# Altium PCB motor4-PCB.PcbDoc
Units mil, origin at the board's own origin, x right, y up, seen from the top; angles counter-clockwise.
Board outline 5665.03 x 3265.03 mil, 2 copper layers (Top Layer, Bottom Layer); 167 components, 188 nets, 655 pads, 115 vias.
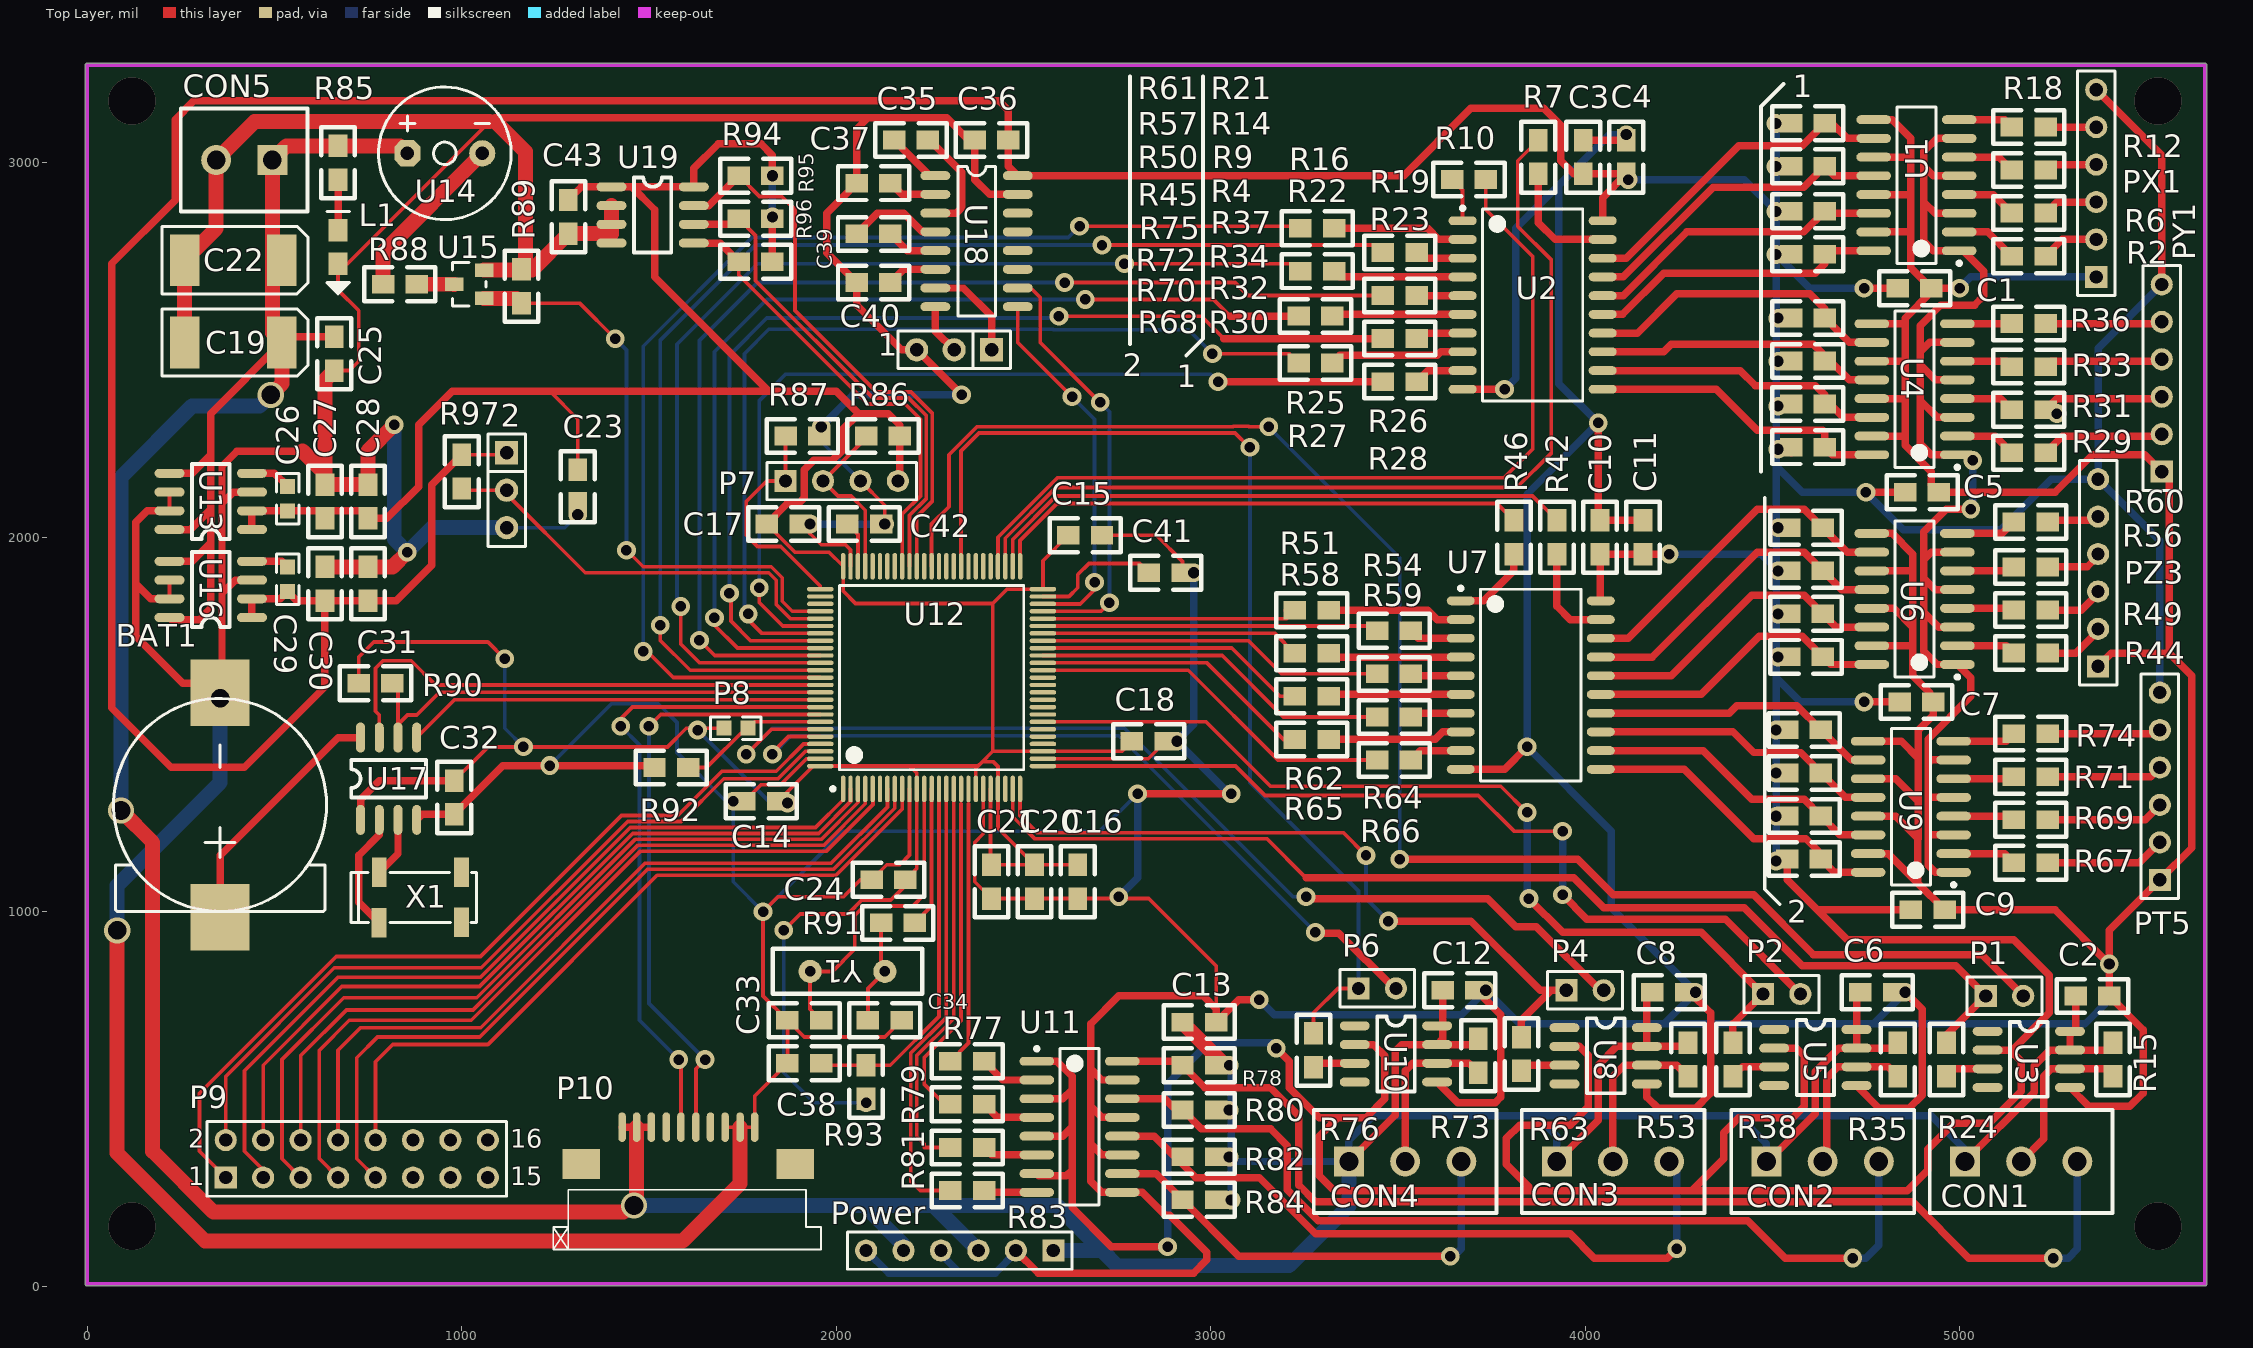
[diagram p0: Top Layer view]
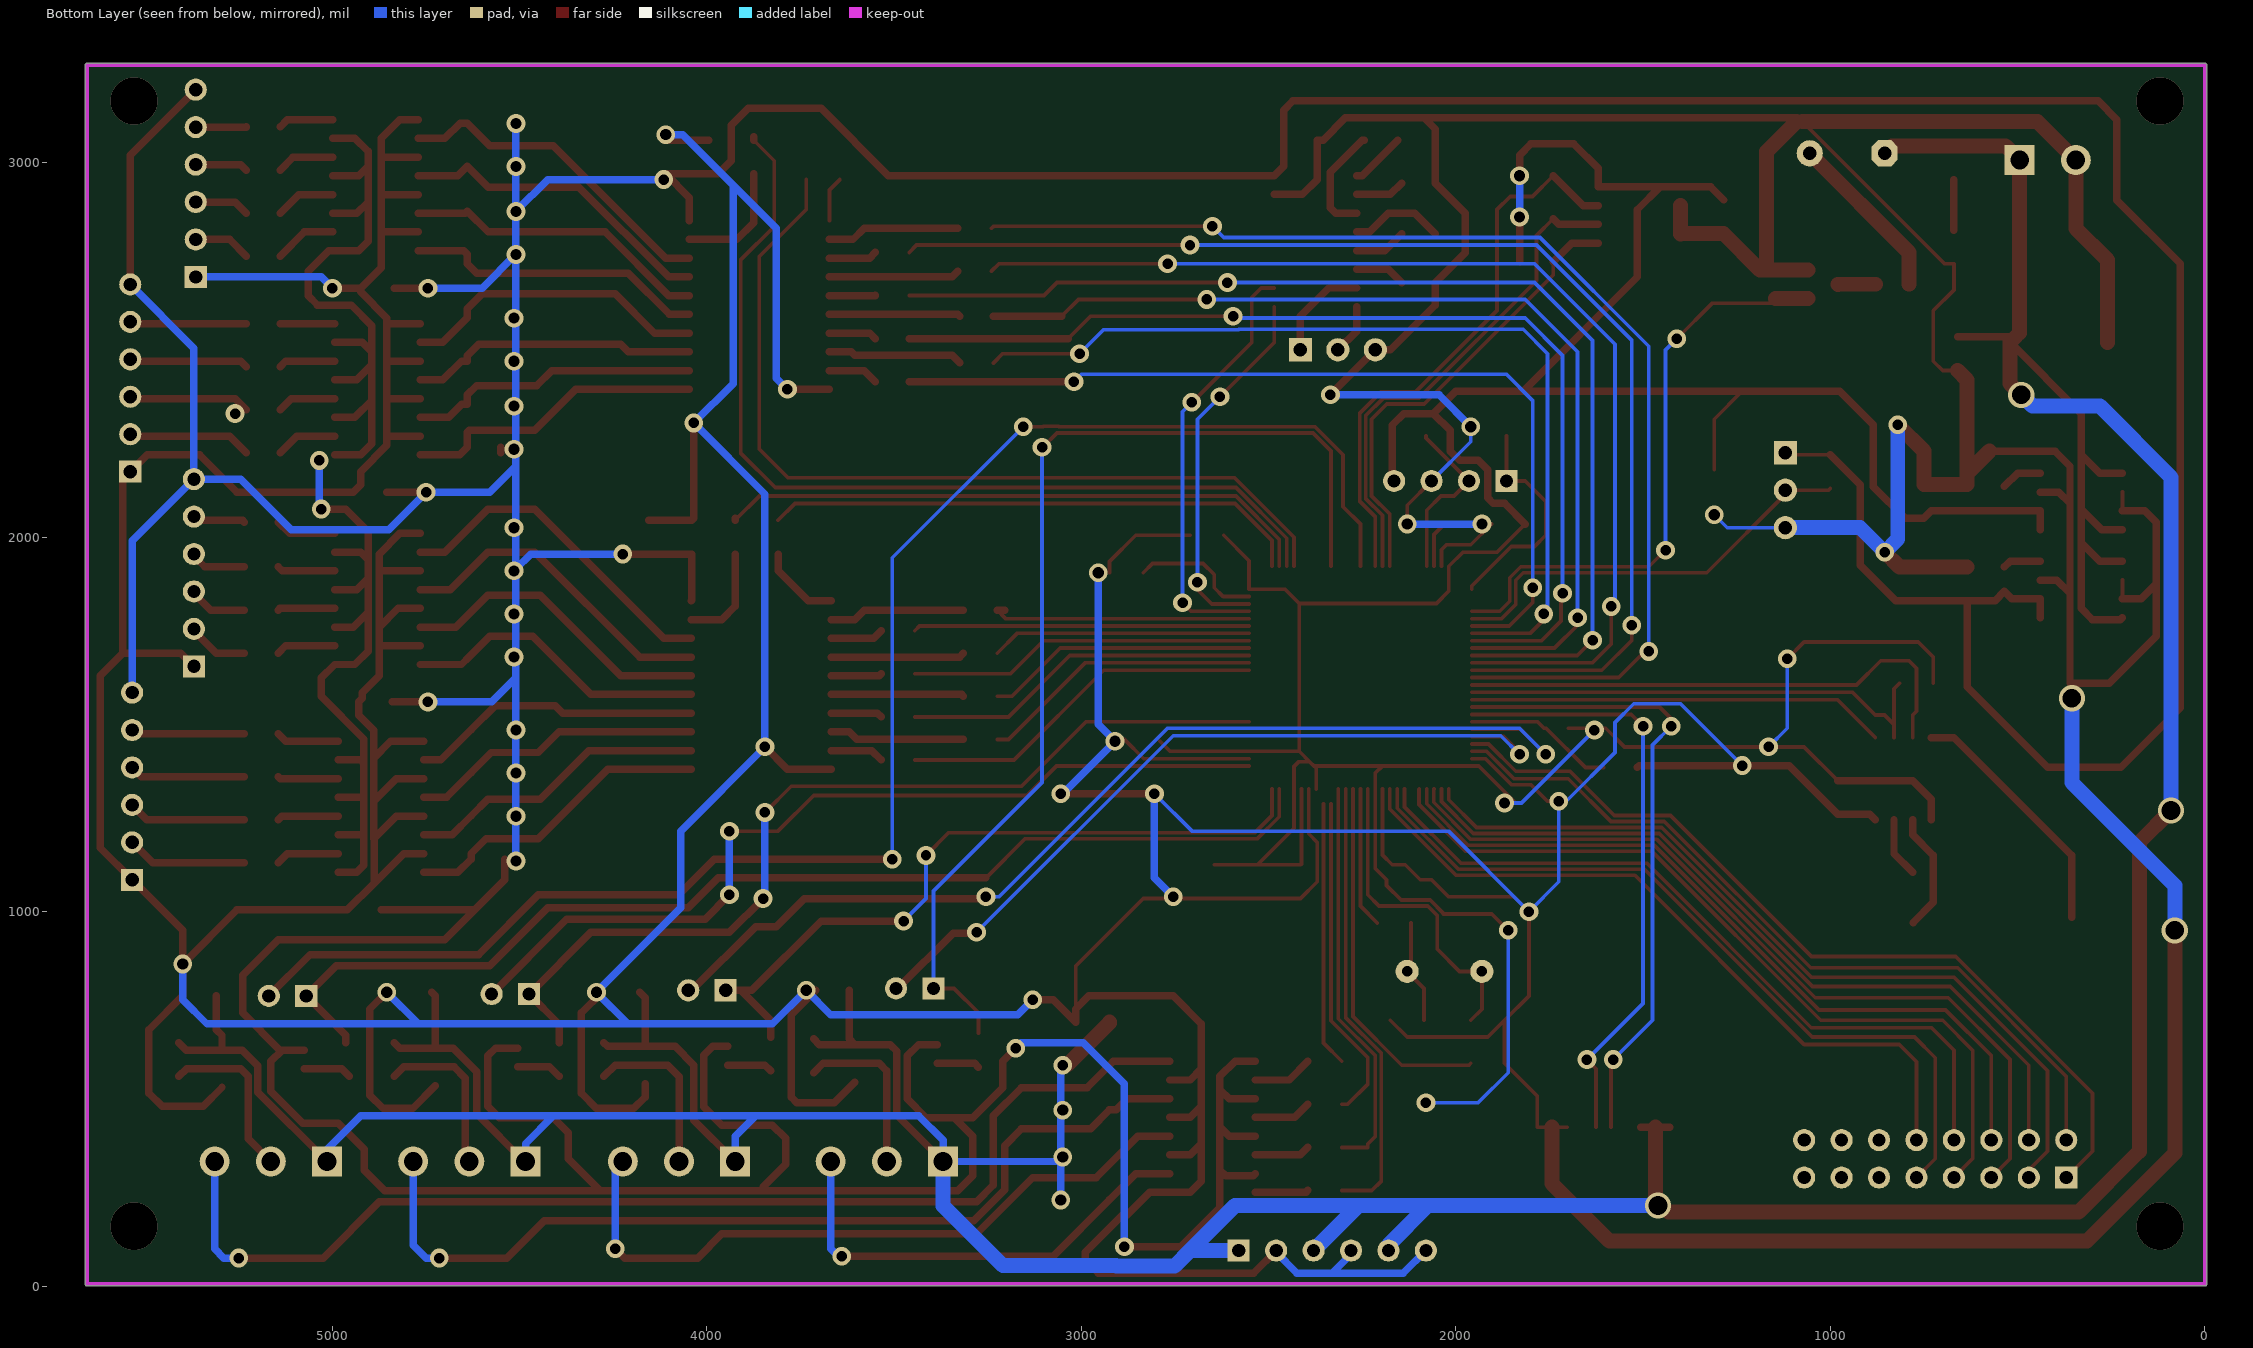
[diagram p1: Bottom Layer view, seen from below]

## Layer stack, top to bottom
Top Solder: solder mask 0.4, Solder Resist, Dk 3.5
Top Layer: signal copper 1.4
Dielectric 1: dielectric 12.6, FR-4, Dk 4.8
Bottom Layer: signal copper 1.4
Bottom Solder: solder mask 0.4, Solder Resist, Dk 3.5

## Board outline
0,0.41 cw(c0,5.43) -5.01,5.43 -5.01,3260.43 cw(c0,3260.43) 0,3265.44 5655,3265.44 cw(c5655,3260.43) 5660.02,3260.43 5660.02,5.43 cw(c5655,5.43) 5655,0.41

## Design rules (kind name [scope] priority, off if disabled: settings)
Clearance [All] p1: gap=6
PolygonConnect [All] p1: connectstyle=Relief reliefconductorwidth=10 reliefentries=4 polygonreliefangle="90 Angle" airgapwidth=10
RoutingVias [All] p1: holewidth=28 width=50 viastyle="Through Hole" minholewidth=28 minwidth=50 maxholewidth=28 maxwidth=50
SilkToSilkClearance [All] p1: silktosilkclearance=0
SilkToSolderMaskClearance [IsPad] p1: minsilkscreentomaskgap=0 clearancetoexposedcopper=TRUE
SolderMaskExpansion [All] p1: expansion=4
Width [All] p1: maxlimit=50 minlimit=10 preferedwidth=10 minimp=50.000000 maximp=50.000000 favimp=50.000000
27 further rules are at their usual default settings.

## Classes and differential pairs
component class stm32-motor4: 1 2 BAT1 C14 C15 C16 C17 C18 C19 C20 C21 C22 C23 C24 C25 C26 C27 C28 C29 C30 C31 C32 C33 C34 C35 C36 C37 C38 C39 C40 C41 C42 C43 CON5 L1 P7 P8 P9 P10 R85 R86 R87 R88 R89 R90 R91 R92 R93 R94 R95 R96 R97 U12 U13 U14 U15 U16 U17 U18 U19 X1 Y1
component class motor-drive: C1 C2 C3 C4 C5 C6 C7 C8 C9 C10 C11 C12 C13 CON1 CON2 CON3 CON4 P1 P2 P4 P6 Power PT5 PX1 PY1 PZ3 R2 R4 R6 R7 R9 R10 R12 R14 R15 R16 R18 R19 R21 R22 R23 R24 R25 R26 R27 R28 R29 R30 R31 R32 R33 R34 R35 R36 R37 R38 R42 R44 R45 R46 R49 R50 R51 R53 R54 R56 R57 R58 R59 R60 R61 R62 R63 R64 R65 R66 R67 R68 R69 R70 R71 R72 R73 R74 R75 R76 R77 R78 R79 R80 R81 R82 R83 R84 U1 U2 U3 U4 U5 U6 U7 U8 U9 U10 U11

## Components (designator, comment, footprint, x,y, rotation, side; value= is the part's Value field where it differs from the comment)
1 "CON3" SIP3 2415,2500.43 r180 top
2 "CON3" SIP3 1120,2225.43 r270 top
BAT1 "BAT3.6V" BAT 355,985 r90 top
C1 "0.1uF" 0805 4835,2665 r0 top
C2 "0.1uF" 0805 5400,775 r180 top
C3 "10uF" 0805 3995,2970 r90 top
C4 "0.1uF" 0805 4110,3060 r270 top
C5 "0.1uF" 0805 4855,2120 r0 top
C6 "0.1uF" 0805 4825,785 r180 top
C7 "0.1uF" 0805 4840,1560 r0 top
C8 "0.1uF" 0805 4270,785 r180 top
C9 "0.1uF" 0805 4870,1005 r0 top
C10 "10uF" 0805 4040,1955 r90 top
C11 "0.1uF" 0805 4155,2045 r270 top
C12 "0.1uF" 0805 3710,790 r180 top
C13 "0.1uF" 0805 2925,705 r0 top
C14 "0.1uF" 0805 1845,1295 r180 top
C15 "0.1uF" 0805 2710,2005 r180 top
C16 "0.1uF" 0805 2645,1035 r90 top
C17 "0.1uF" 0805 1905,2035 r180 top
C18 "0.1uF" 0805 2880,1455 r180 top
C19 "100uF" 100UF/25V_CA 520,2520 r180 top
C20 "0.1uF" 0805 2530,1035 r90 top
C21 "0.1uF" 0805 2415,1035 r90 top
C22 "100uF" 100UF/25V_CA 520,2740 r180 top
C23 "0.1uF" 0805 1310,2090 r90 top
C24 "0.1uF" 0805 2095,1085 r0 top
C25 "0.1uF" 0805 660,2535 r270 top
C26 "103" 0603 535,2070.43 r90 top
C27 "10uF" 0805 635,2050.43 r90 top
C28 "104" 0805 750,2050.43 r90 top
C29 "103" 0603 535,1855.43 r90 top
C30 "10uF" 0805 635,1830.43 r90 top
C31 "104" 0805 750,1830.43 r90 top
C32 "104" 0805 980,1260 r90 top
C33 "8pF" 0805 1960,710 r180 top
C34 "8pF" 0805 2085,710 r0 top
C35 "104" 0805 2245,3060.43 r180 top
C36 "104" 0805 2460,3060.43 r180 top
C37 "104" 0805 2055,2945.43 r0 top
C38 "100nF" 0805 1960,595 r180 top
C39 "104" 0805 2145,2810 r180 top
C40 "104" 0805 2055,2680 r0 top
C41 "2.2uF" 0805 2835,1905 r0 top
C42 "2.2uF" 0805 2030,2035 r0 top
C43 "104" 0805 1285,2900.43 r270 top
CON1 "Header 3" CON3 5150,400 r0 top
CON2 "Header 3" CON3 4620,400 r0 top
CON3 "Header 3" CON3 4060,400 r0 top
CON4 "Header 3" CON3 3505,400 r0 top
CON5 "5VIN" CON2 405,2955 r180 top
L1 "LED" 0805LED 670,2820 r270 top
P1 "Header 2" HDR1X2 5070,775 r0 top
P2 "Header 2" HDR1X2 4475,780 r0 top
P4 "Header 2" HDR1X2 3950,790 r0 top
P6 "Header 2" HDR1X2 3395,795 r0 top
P7 "JTAG" HDR1X4 1865,2150 r0 top
P8 "boot" 0603 1765,1490 r180 top
P9 "Header 8X2" HDR2X8 370,290 r0 top
P10 "ping" PCBComponent_1 1605,375 r0 top
Power "Header 6" HDR1X6 2580,95 r180 top
PT5 "Header 6" HDR1X6 5535,1085 r90 top
PX1 "Header 6" HDR1X6 5365,2695 r90 top
PY1 "Header 6" HDR1X6 5540,2175 r90 top
PZ3 "Header 6" HDR1X6 5370,1655 r90 top
R2 "1K" 0805 5140,2750.43 r0 top
R4 "1K" 0805 4550,2755.43 r0 top
R6 "1K" 0805 5140,2865.43 r0 top
R7 "1K" 0805 3875,3060 r270 top
R9 "1K" 0805 4550,2870.43 r0 top
R10 "1K" 0805 3735,2955 r180 top
R12 "1K" 0805 5140,2980.43 r0 top
R14 "1K" 0805 4550,2990.43 r0 top
R15 "1K" 0805 5410,560 r90 top
R16 "1K" 0805 3240,2825 r0 top
R18 "1K" 0805 5140,3095.43 r0 top
R19 "1K" 0805 3460,2760.43 r0 top
R21 "1K" 0805 4550,3105.43 r0 top
R22 "1K" 0805 3240,2710.43 r0 top
R23 "1K" 0805 3460,2645.43 r0 top
R24 "1K" 0805 4965,650 r270 top
R25 "1K" 0805 3235,2590.43 r0 top
R26 "1K" 0805 3460,2530.43 r0 top
R27 "1K" 0805 3235,2465.43 r0 top
R28 "1K" 0805 3460,2415.43 r0 top
R29 "1K" 0805 5140,2225.43 r0 top
R30 "1K" 0805 4550,2240.43 r0 top
R31 "1K" 0805 5140,2340.43 r0 top
R32 "1K" 0805 4550,2355.43 r0 top
R33 "1K" 0805 5140,2455.43 r0 top
R34 "1K" 0805 4550,2470.43 r0 top
R35 "1K" 0805 4835,560 r90 top
R36 "1K" 0805 5140,2570.43 r0 top
R37 "1K" 0805 4550,2585.43 r0 top
R38 "1K" 0805 4395,650 r270 top
R42 "1K" 0805 3925,2045 r270 top
R44 "1K" 0805 5145,1690.43 r0 top
R45 "1K" 0805 4545,1680.43 r0 top
R46 "1K" 0805 3810,2045 r270 top
R49 "1K" 0805 5145,1805.43 r0 top
R50 "1K" 0805 4545,1795.43 r0 top
R51 "1K" 0805 3225,1805 r0 top
R53 "1K" 0805 4275,560 r90 top
R54 "1K" 0805 3445,1750 r0 top
R56 "1K" 0805 5145,1920.43 r0 top
R57 "1K" 0805 4545,1910.43 r0 top
R58 "1K" 0805 3225,1690 r0 top
R59 "1K" 0805 3445,1635 r0 top
R60 "1K" 0805 5145,2040.43 r0 top
R61 "1K" 0805 4545,2025.43 r0 top
R62 "1K" 0805 3225,1575 r0 top
R63 "1K" 0805 3830,665 r270 top
R64 "1K" 0805 3445,1520 r0 top
R65 "1K" 0805 3225,1460 r0 top
R66 "1K" 0805 3445,1405 r0 top
R67 "1K" 0805 5145,1130.43 r0 top
R68 "1K" 0805 4540,1140.43 r0 top
R69 "1K" 0805 5145,1245.43 r0 top
R70 "1K" 0805 4540,1255.43 r0 top
R71 "1K" 0805 5145,1360.43 r0 top
R72 "1K" 0805 4540,1370.43 r0 top
R73 "1K" 0805 3715,570 r90 top
R74 "1K" 0805 5145,1475.43 r0 top
R75 "1K" 0805 4540,1485.43 r0 top
R76 "1K" 0805 3275,675 r270 top
R77 "1K" 0805 2395,600.43 r180 top
R78 "1K" 0805 2925,590 r0 top
R79 "1K" 0805 2395,485.43 r180 top
R80 "1K" 0805 3015,470.43 r180 top
R81 "1K" 0805 2395,370.43 r180 top
R82 "1K" 0805 3015,345.43 r180 top
R83 "1K" 0805 2395,255.43 r180 top
R84 "1K" 0805 3015,230.43 r180 top
R85 "5.1K" 0805 670,2955 r90 top
R86 "4.7K" 0805 2170,2270 r180 top
R87 "4.7K" 0805 1865,2270 r0 top
R88 "100" 0805 880,2675.43 r180 top
R89 "1M" 0805 1160,2715 r270 top
R90 "5.1K" 0805 815,1610 r180 top
R91 "390" 0805 2210,970 r180 top
R92 "4.7K" 0805 1515,1385 r0 top
R93 "10K" 0805 2080,590 r270 top
R94 "5.1K" 0805 1740,2965.43 r0 top
R95 "5.1K" 0805 1740,2850.43 r0 top
R96 "5.1K" 0805 1740,2735.43 r0 top
R97 "5.1K" 0805 1000,2130 r90 top
U1 "TLP291" SOIC-TLP291-4-16N 4885,2940 r180 top
U2 "CD74HC245M" DW0020A_N 3860,2620 r0 top
U3 "6N137" SO-8 5075,680.43 r0 top
U4 "TLP291" SOIC-TLP291-4-16N 4880,2395 r180 top
U5 "6N137" SO-8 4505,685.43 r0 top
U6 "TLP291" SOIC-TLP291-4-16N 4880,1835 r180 top
U7 "CD74HC245M" DW0020A_N 3855,1605 r0 top
U8 "6N137" SO-8 3945,690 r0 top
U9 "TLP291" SOIC-TLP291-4-16N 4870,1280 r180 top
U10 "6N137" SO-8 3385,695 r0 top
U11 "TLP291" SOIC-TLP291-4-16N 2650,425.43 r0 top
U12 "STM32F405VGT6" STM-LQFP100_N 2255,1625 r90 top
U13 "LTC1763-33" SO-8 440,2020.43 r180 top
U14 "BZ" BZ_SMALL 955,3025 r270 top
U15 "SI2306" SOT-23 980,2675 r90 top
U16 "LTC1763-33" SO-8 440,1785.43 r180 top
U17 "DS1302" SO-8 730,1245 r90 top
U18 "MAX3232" SO-16 2265,2965.43 r0 top
U19 "FM24C64" SO-8 1400,2935.43 r0 top
X1 "32K" XTAL-2 780,1105 r0 top
Y1 "XTAL" XTAL1 1930,840 r0 top

## Footprints (in the part's own frame and the unit in brackets; to place one, negate y for a bottom-side part, rotate by r counter-clockwise, add the part's x,y. Pads: shape width x height; smd on the part's side, far side on the other; paste and mask are expansions set on the pad)
100UF/25V_CA [mm]
  rect 2x3.5 smd: 1(0,0) 2(6.604,0)
  silkscreen extent -1.78,-2.29 8.13,2.29
0603 [mil]
  rect 40x40 smd: 1(0,0) 2(65,0)
  silkscreen extent -35,-30 100,30
0805 [mil]
  rect 60x50 smd: 1(0,0) 2(90,0)
  silkscreen extent -50,-45 140,45
0805LED [mil]
  rect 60x50 smd: 1(0,0) 2(90,0)
  silkscreen extent -50,-30 170,30
BAT [mm]
  rect 4.5x4 smd: 1(0,0) 2(15.24,0)
  silkscreen extent 0.4,-7.22 14.84,7.22
BZ_SMALL [mil]
  oct 70x70 hole 36: 1(0,-100)
  round 70 hole 36: 2(0,100)
  silkscreen extent -177,-177 177,177
CON2 [mil]
  rect 80x80 hole 50: 1(-89.45,-52.2)
  round 80 hole 50: 2(60.55,-52.2)
  silkscreen extent -183,-190 155,86
CON3 [mil]
  rect 80x80 hole 50: 1(-135.51,-67.2)
  round 80 hole 50: 2(14.49,-67.2) 3(164.49,-67.2)
  silkscreen extent -229,-205 259,71
DW0020A_N [mm] "SOIC, 20-Leads, Body 13x7.6mm, Pitch 1.27mm, IPC Medium Density"
  oval 1.9x0.6 smd: 1(-4.75,5.715) 2(-4.75,4.445) 3(-4.75,3.175) 4(-4.75,1.905) 5(-4.75,0.635) 6(-4.75,-0.635) 7(-4.75,-1.905) 8(-4.75,-3.175) 9(-4.75,-4.445) 10(-4.75,-5.715) 11(4.75,-5.715) 12(4.75,-4.445) 13(4.75,-3.175) 14(4.75,-1.905) 15(4.75,-0.635) 16(4.75,0.635) 17(4.75,1.905) 18(4.75,3.175) 19(4.75,4.445) 20(4.75,5.715)
  silkscreen extent -4.87,-6.5 3.4,6.69, body extent -5.16,-6.4 5.16,6.4, height 2.65
HDR1X2 [mm] "Connector; Header; 2 Position"
  rect 1.5x1.5 hole 0.9: 1(0,0)
  round 1.5 hole 0.9: 2(2.54,0)
  silkscreen extent -1.27,-1.27 3.81,1.27
HDR1X4 [mm] "Connector; Header; 4 Position"
  rect 1.5x1.5 hole 0.9: 1(0,0)
  round 1.5 hole 0.9: 2(2.54,0) 3(5.08,0) 4(7.62,0)
  silkscreen extent -1.27,-1.27 8.89,1.27
HDR1X6 [mm] "Connector; Header; 6 Position"
  rect 1.5x1.5 hole 0.9: 1(0,0)
  round 1.5 hole 0.9: 2(2.54,0) 3(5.08,0) 4(7.62,0) 5(10.16,0) 6(12.7,0)
  silkscreen extent -1.27,-1.27 13.97,1.27
HDR2X8 [mm] "Connector; Header; 8x2 Position"
  rect 1.5x1.5 hole 0.9: 1(0,0)
  round 1.5 hole 0.9: 2(0,2.54) 3(2.54,0) 4(2.54,2.54) 5(5.08,0) 6(5.08,2.54) 7(7.62,0) 8(7.62,2.54) 9(10.16,0) 10(10.16,2.54) 11(12.7,0) 12(12.7,2.54) 13(15.24,0) 14(15.24,2.54) 15(17.78,0) 16(17.78,2.54)
  silkscreen extent -1.27,-1.27 19.05,3.81
PCBComponent_1 [mil]
  rect 100x80 smd: 0(-285.5,-49.5) 0(285.5,-49.5)
  oval 20x79 smd: 1(-176.5,49.5) 2(-137.5,49.5) 3(-98.5,49.5) 4(-58.5,49.5) 5(-19.5,49.5) 6(20.5,49.5) 7(59.5,49.5) 8(98.5,49.5) 9(138.5,49.5) 10(177.5,49.5)
  silkscreen extent -360,-278 354,-118
SIP3 [mil]
  rect 62x62 hole 36: 1(0,0)
  round 62 hole 36: 2(100,0) 3(200,0)
  silkscreen extent -50,-50 250,50
SO-8 [mil]
  oval 80x24 smd: 1(0,0) 2(0,-50) 3(0,-100) 4(0,-150) 5(220,-150) 6(220,-100) 7(220,-50) 8(220,0)
  silkscreen extent 60,-175 160,25
SO-16 [mil]
  oval 80x24 smd: 1(0,0) 2(0,-50) 3(0,-100) 4(0,-150) 5(0,-200) 6(0,-250) 7(0,-300) 8(0,-350) 9(220,-350) 10(220,-300) 11(220,-250) 12(220,-200) 13(220,-150) 14(220,-100) 15(220,-50) 16(220,0)
  silkscreen extent 60,-375 160,25
SOIC-TLP291-4-16N [mm] "SOIC, 16-Leads, Body 10.35x4.60mm, Pitch 1.27mm, IPC Medium Density"
  oval 2.35x0.6 smd: 1(-2.9,4.445) 2(-2.9,3.175) 3(-2.9,1.905) 4(-2.9,0.635) 5(-2.9,-0.635) 6(-2.9,-1.905) 7(-2.9,-3.175) 8(-2.9,-4.445) 9(2.9,-4.445) 10(2.9,-3.175) 11(2.9,-1.905) 12(2.9,-0.635) 13(2.9,0.635) 14(2.9,1.905) 15(2.9,3.175) 16(2.9,4.445)
  silkscreen extent -3.03,-5.3 1.33,5.42, body extent -2.4,-5.3 2.4,5.3, height 2.1
SOT-23 [mil]
  rect 36x50 smd: B(-37,-80) C(0,0) E(38,-80)
  silkscreen extent -57,-85 58,5
STM-LQFP100_N [mm] "Thin QFP, 100-Leads, Body 14x14mm, Pitch 0.5mm, IPC Medium Density"
  oval 1.8x0.3 smd: 1(-7.55,6) 2(-7.55,5.5) 3(-7.55,5) 4(-7.55,4.5) 5(-7.55,4) 6(-7.55,3.5) 7(-7.55,3) 8(-7.55,2.5) 9(-7.55,2) 10(-7.55,1.5) 11(-7.55,1) 12(-7.55,0.5) 13(-7.55,0) 14(-7.55,-0.5) 15(-7.55,-1) 16(-7.55,-1.5) 17(-7.55,-2) 18(-7.55,-2.5) 19(-7.55,-3) 20(-7.55,-3.5) 21(-7.55,-4) 22(-7.55,-4.5) 23(-7.55,-5) 24(-7.55,-5.5) 25(-7.55,-6) 51(7.55,-6) 52(7.55,-5.5) 53(7.55,-5) 54(7.55,-4.5) 55(7.55,-4) 56(7.55,-3.5) 57(7.55,-3) 58(7.55,-2.5) 59(7.55,-2) 60(7.55,-1.5) 61(7.55,-1) 62(7.55,-0.5) 63(7.55,0) 64(7.55,0.5) 65(7.55,1) 66(7.55,1.5) 67(7.55,2) 68(7.55,2.5) 69(7.55,3) 70(7.55,3.5) 71(7.55,4) 72(7.55,4.5) 73(7.55,5) 74(7.55,5.5) 75(7.55,6)
  oval 0.3x1.8 smd: 26(-6,-7.55) 27(-5.5,-7.55) 28(-5,-7.55) 29(-4.5,-7.55) 30(-4,-7.55) 31(-3.5,-7.55) 32(-3,-7.55) 33(-2.5,-7.55) 34(-2,-7.55) 35(-1.5,-7.55) 36(-1,-7.55) 37(-0.5,-7.55) 38(0,-7.55) 39(0.5,-7.55) 40(1,-7.55) 41(1.5,-7.55) 42(2,-7.55) 43(2.5,-7.55) 44(3,-7.55) 45(3.5,-7.55) 46(4,-7.55) 47(4.5,-7.55) 48(5,-7.55) 49(5.5,-7.55) 50(6,-7.55) 76(6,7.55) 77(5.5,7.55) 78(5,7.55) 79(4.5,7.55) 80(4,7.55) 81(3.5,7.55) 82(3,7.55) 83(2.5,7.55) 84(2,7.55) 85(1.5,7.55) 86(1,7.55) 87(0.5,7.55) 88(0,7.55) 89(-0.5,7.55) 90(-1,7.55) 91(-1.5,7.55) 92(-2,7.55) 93(-2.5,7.55) 94(-3,7.55) 95(-3.5,7.55) 96(-4,7.55) 97(-4.5,7.55) 98(-5,7.55) 99(-5.5,7.55) 100(-6,7.55)
  silkscreen extent -7.67,-6.25 6.25,6.82, body extent -7,-7 7,7, height 1.6
XTAL1 [mil]
  round 62 hole 28: 1(0.37,0.28) 2(200.37,0.28)
  silkscreen extent -100,-60 300,60
XTAL-2 [mm]
  rect 1x2 smd: 1(0,0) 2(-0.025,-3.404) ""(5.579,-3.378) ""(5.579,0)
  silkscreen extent -1.93,-3.4 6.59,0

## Part data
1 2: "Connector"
C1 C2 C3 C4 C5 C6 C7 C8 C9 C10 C11 C12 C13: library part CAP, "Capacitor"
C14 C15 C16 C17 C18 C20 C21 C23 C24 C25 C26 C27 C28 C29 C30 C31 C32 C33 C34 C35 C36 C37 C38 C39 C40 C41 C42 C43: library part C
C19 C22: library part ELECTRO1
CON1 CON2 CON3 CON4: "Header, 3-Pin"
CON5 P8: library part "Header 2", "Header, 2-Pin"
P1 P2 P4 P6: "Header, 2-Pin"
P7: library part "Header 4", "Header, 4-Pin"
P9: "Header, 8-Pin, Dual row"
P10: library part "Header 10", "Header, 10-Pin"
Power PT5 PX1 PY1 PZ3: "Header, 6-Pin"
R2 R4 R6 R7 R9 R10 R12 R14 R15 R16 R18 R19 R21 R22 R23 R24 R25 R26 R27 R28 R29 R30 R31 R32 R33 R34 R35 R36 R37 R38 R42 R44 R45 R46 R49 R50 R51 R53 R54 R56 R57 R58 R59 R60 R61 R62 R63 R64 R65 R66 R67 R68 R69 R70 R71 R72 R73 R74 R75 R76 R77 R78 R79 R80 R81 R82 R83 R84: library part RES2
R85 R86 R87 R88 R89 R90 R91 R92 R93 R94 R95 R96 R97: library part RES
U1 U4 U6 U9 U11: library part TLP291-4, "光耦隔离"
U2 U7: "High Speed CMOS Logic Non-Inverting Octal-Bus Transceivers with 3-State Outputs, DW0020A, TUBE"
U3 U5 U8 U10: library part HCPL2400
U12: "ARM Cortex-M4 32-bit MCU+FPU, 210 DMIPS, 1024 kB Flash, 192 kB Internal RAM, 82 I/Os, 100-pin LQFP, -40 to 85 degC, Tray"
U13 U16: library part LT1763
U15: library part MOFET_N
X1: library part XTAL
Y1: "Crystal Oscillator"

## Via types
v1: diameter 50, hole 28, Top Layer to Bottom Layer, 73 vias
v2: diameter 50, hole 30, Top Layer to Bottom Layer, 33 vias
v3: diameter 70, hole 50, Top Layer to Bottom Layer, 5 vias
v4: diameter 126, hole 126, Top Layer to Bottom Layer, 4 vias

## Nets (pads, with @x,y where several pads share a name; then routed paths per layer and width w, separated by ;. In a path a pad name is that pad's centre, name@x,y a point inside that pad or via, vN(x,y) a via of type N, cw(c..) or ccw(c..) an arc to the next point about the centre after c; other vN are vias at no path point)
18B20: 2.2 R97.1 U12.80 | length 1145.9
  Top Layer w10: R97.1 1004.57,2125.43 2.2 1120,2115 1330,1905 1820,1905 1840,1885 1840,1820 1877.52,1782.48 U12.80
+3.3V_D: C14.1 C15.2 C16.2 C17.2 C18.2 C20.2 C21.2 C23.2 C24.2 C26.1 C27.1 C28.1 C32.2 C43.1 P7.4 P8.2 R86.1 R90.2 R93.2 R94.2 R95.2 R96.2 U12.11 U12.19 U12.21 U12.22 U12.28 U12.50 U12.75 U12.100 U13.1 U13.2 U17.1 U19.1 U19.8 | length 11353.4
  Top Layer w10: R90.2 725,1680 765,1720 1070,1720 v1(1115,1675) ; C32.2 1070,1440 v1(1165,1440) 1550,1440 1600,1490 P8.2 ; 1235,2390 1310,2315 C23.2 ; C17.2 1890,1960 1981.02,1960 U12.75 2018.78,1856.22 2051.85,1823.15 2418.15,1823.15 ; C14.1 1938.78,1388.78 U12.100 2196.22,1388.78 ; v1(1860,950) 1904,994 2034,994 2034,996.63 2068.37,1031 2146,1031 2185,1070 C24.2 2215.63,1115.63 U12.11 2215.63,1369.37 2196.22,1388.78 ; U12.19 2373.11,1383.11 2378.78,1388.78 ; U12.21 2412.48,1127.52 C21.2 C20.2 ; C15.2 2552.24,1937.24 U12.50 2456.22,1861.22 2418.15,1823.15 ; C16.2 C20.2 ; C18.2 2763.15,1428.15 U12.28 2418.15,1428.15 ; 2196.22,1388.78 2378.78,1388.78 ; 2378.78,1388.78 2390,1400 ; 2390,1400 2420,1400 2432.17,1387.83 U12.22 2432.17,1222.83 C20.2 ; 2390,1400 2418.15,1428.15 ; 2418.15,1428.15 2418.15,1823.15
  Top Layer w20: U13.1 U13.2 730,2070.43 C28.1 800.43,2050.43 885,2135 885,2300 975,2390 1235,2390 1820,2390 ; U17.1 730,1300 780,1350 C32.2 ; C43.1 1320,2935.43 U19.1 1454.57,2935.43 ; C17.2 1870,2090 1900,2090 1915,2105 1915,2180 1940,2205 1990,2205 2015,2230 2015,2285 2060,2330 ; R96.2 R95.2 ; R94.2 1830,3020 1800,3050 1685,3050 1620,2985 U19.8 1454.57,2935.43 ; P7.4 2170,2155 R86.1 2170,2299.5 2139.5,2330 2060,2330 ; 1454.57,2935.43 1515,2875 1515,2695 1820,2390 ; 1820,2390 2000,2390 2060,2330
  Bottom Layer w10: v1(1115,1675) 1115,1490 v1(1165,1440) ; v1(1630,1485) 1825,1290 v2(1870,1290) ; v1(1860,950) 1860,570 1940,490 v1(2080,490)
  Bottom Layer w20: v2(1830,2855) v2(1830,2965)
+3.3V_DO: 2.1 C1.1 C3.1 C4.2 C5.1 C7.1 C9.1 C10.1 C11.2 C29.1 C30.1 C31.1 C36.1 PT5.6 PX1.6 PY1.6 PZ3.6 R4.1 R9.1 R14.1 R21.1 R30.1 R32.1 R34.1 R37.1 R45.1 R50.1 R57.1 R61.1 R68.1 R70.1 R72.1 R75.1 R97.2 U2.20 U3.2 U5.2 U7.20 U8.2 U10.2 U11.1 U11.3 U11.5 U11.7 U16.1 U16.2 U18.16 | length 22235.1
  Top Layer w10: R97.2 1114.57,2220 2.1
  Top Layer w20: U16.1 U16.2 515,1835.43 C29.1 560,1830.43 C30.1 ; R97.2 920,2140 920,1925 825.43,1830.43 C31.1 C30.1 ; U11.7 2541.26,295 2615,295 2630,310 ; U11.5 2605.43,400.43 2630,425 ; U11.3 2605.43,500.43 2630,525 ; U11.1 2589.57,600.43 2630,560 2630,525 ; v1(2885,105) 2735,105 2630,210 2630,310 ; v1(3175,635) 3210,600 3210,530 3290,450 3340,450 ; U10.2 3435,645 3465,615 3465,500 3415,450 3340,450 ; 3850,265 3790,325 3790,395 3825,430 3960,430 4009,479 4009,616 3985,640 U8.2 ; U7.20 4040,1832.01 C10.1 C11.2 v1(4225,1955) ; U2.20 4047.01,2907.01 C4.2 C3.1 3970,2970 3935,3005 3935,3100 3890,3145 3695,3145 3515.43,2965.43 U18.16 2460,2990.43 C36.1 2460,3140 2435,3165 285,3165 235,3115 235,2900 65,2730 65,1545 225,1385 420,1385 635,1600 C30.1 ; U5.2 4564.57,635.43 4585,615 4585,480 4555,450 4410,450 4370,410 4370,340 4285,255 ; R68.1 4540,1085 4620,1005 ; R30.1@4550,2225 R30.1 ; v1(4745,1560) C7.1 ; v1(4745,2665) C1.1 ; v1(4750,2120) C5.1 ; C9.1 4620,1005 ; U3.2 5134.57,630.43 ; PX1.6 5540,3020 PY1.6 ; 2630,310 2630,425 ; 2630,425 2630,525 ; 3340,450 3290,400 3290,295 3330,255 4285,255 ; 4285,255 4860,255 4915,310 4915,365 4985,435 5079.92,435 5165,520.08 5165,600 5134.57,630.43 ; 4620,1005 4700,925 5145,925 5240,830 5240,730 5140.43,630.43 5134.57,630.43
  Bottom Layer w20: v1(2885,105) 2885,540 2995,650 3160,650 v1(3175,635) ; v1(4115,2955) 4425,2955 v2(4510,2870) ; v1(4225,1955) 4470,1955 v2@4510,1915 ; v2(4510,1135) v2(4510,1255) v2(4510,1370) v2(4510,1485) 4510,1625 ; v2(4510,3105) v2(4510,2990) v2(4510,2870) ; v2(4515,1910) v2@4510,1915 ; v1(4745,1560) 4575,1560 4510,1625 ; v1(4745,2665) 4600,2665 v2(4510,2755) ; PT5.6 5535,1990 PZ3.6 ; PY1.6 5370,2505 PZ3.6 ; 4510,1625 4510,1675 v2(4515,1680) 4510,1685 v2@4510,1915 ; v2@4510,1915 4510,2190 ; 4510,2190 4580,2120 v1(4750,2120) 4850,2020 5110,2020 5245,2155 PZ3.6 ; 4510,2190 v2(4510,2755) ; v2(4510,2755) v2(4510,2870)
  other v2: 4515,1795 4515,2025 4515,2235 4515,2350 4515,2470 4515,2585
+5V_A: U1.1 U1.3 U1.5 U1.7 U4.1 U4.3 U4.5 U4.7 U6.1 U6.3 U6.5 U6.7 U9.1 U9.3 U9.5 U9.7 | length 3678.5
  Top Layer w20: 4921,1305 U9.5 ; U9.1 4935,1105 4916,1124 4916,1205 ; U9.3 4916,1205 ; U9.7 4925,1405 4916,1396 ; U6.3 4945,1760 4905,1800 ; U6.5 4935,1860 4905,1890 ; U6.7 4925,1960 4905,1940 ; U4.1 4925,2220 4895,2250 4895,2365 ; U4.3 4940,2320 4895,2365 ; U4.5 4935,2420 4895,2460 ; U4.7 4920,2520 4895,2495 ; U1.3 4935,2865 4905,2895 ; U1.5 4930,2965 4905,2990 ; U1.7 4940,3065 4905,3030 4905,2990 ; v1(5030,2075) 4965,2075 4905,2015 4905,1940 ; 4895,2365 4895,2460 ; 4895,2460 4895,2495 ; 4895,2495 4895,2565 4950,2620 5040,2620 5065,2645 5065,2710 5010,2765 U1.1 4930,2765 4905,2790 4905,2895 ; 4905,1800 4905,1695 4940,1660 U6.1 5030,1624.17 5030,1575 4916,1461 4916,1396 ; 4905,1800 4905,1890 ; 4905,1890 4905,1940 ; 4905,2895 4905,2990 ; 4916,1205 4916,1396
  Bottom Layer w20: v1(5030,2075) 5035,2080 v1(5035,2205)
+5V_IN: C2.2 C6.2 C8.2 C12.2 C13.1 C19.1 C22.1 C25.1 CON1.1 CON2.1 CON3.1 CON4.1 CON5.1 P10.1 P10.2 P10.3 Power.1 Power.3 Power.5 R15.2 R35.2 R53.2 R73.2 R78.2 R80.1 R82.1 R84.1 R85.2 U3.7 U3.8 U5.7 U5.8 U8.7 U8.8 U10.7 U10.8 U13.5 U13.8 U14.1 U16.5 U16.8 | length 14926.3
  Top Layer w20: U16.8 225.43,1780 300,1780 330,1810 330,1985 ; U16.5 280.43,1935.43 330,1985 ; U13.8 275.43,2020.43 330,2075 ; U13.5 280.43,2170.43 330,2220 ; C19.1@494.45,2545.55 505,2535 C25.1 ; C19.1 330,2330 330,2220 ; P10.1 P10.2 P10.3 ; CON4.1 3492.5,455.81 3492.5,627.5 3510,645 U10.7 ; C12.2 3620,660 U10.7 ; R73.2 3700,645 U10.7 ; CON3.1 4035,443.31 4035,590 4085,640 U8.7 ; C8.2 4165,770 U8.8 U8.7 ; R53.2 4265,640 U8.7 ; CON2.1 4487.8,332.8 4615,460 4615,572.43 4678,635.43 U5.7 ; C6.2 4725,775 U5.8 U5.7 ; R35.2 4820.43,635.43 U5.7 ; CON1.1 5199,517.31 5199,589 5240.43,630.43 U3.7 ; C2.2 5310,685 5295,670 U3.7 ; R15.2 5390.43,630.43 U3.7 ; 330,1985 330,2075 ; 330,2075 330,2220
  Top Layer w40: v3@85,1275 v3(90,1270) 175,1185 175,360 337.5,197.5 1432.5,197.5 1467.5,232.5 P10.2 ; v3(490,2380) 520,2410 C19.1 C19.1@505,2535 ; C19.1@494.45,2545.55 CON5.1 532.24,3045 R85.2 835,3045 U14.1 ; C13.1 2925,703.23 3038.23,590 v1(3050,590)
  Bottom Layer w20: v2(3050,345) v2@3055,340 ; v2(3055,230) v2@3055,340 ; v1@3055,590 v2@3055,340 ; CON3.1 3924.49,400.51 3870,455 ; CON2.1 4484.49,380.51 4410,455 ; CON1.1 5014.49,365.51 4925,455 4410,455 ; v2@3055,340 3062.2,332.8 CON4.1 3369.49,389.49 3435,455 3870,455 ; 3870,455 4410,455
  Bottom Layer w40: v3(90,1270) 90,2160 280,2350 460,2350 v3(490,2380) ; v3(1460,215) 2075,215 ; Power.5 2180,110 2075,215 ; Power.3 2260,215 ; Power.1 2710,95 ; CON4.1 3369.49,214.49 3210,55 2907.12,55 2906.12,54 2751,54 2710,95 ; 2075,215 2260,215 ; 2260,215 2590,215 2710,95
  other v2: 3050,470
BREAK_DIR1: R46.1 U12.51 | length 1447.3
  Top Layer w10: U12.51 2491.22,1991.22 2590,2090 3765,2090 R46.1
BREAK_DIR2: R10.1 U12.54 | length 2374.7
  Top Layer w10: U12.54 2432.17,2000.05 2590.93,2158.81 3783.81,2158.81 3860,2235 3860,2750 3735,2875 R10.1
BREAK_IN1: R16.1 U12.88 | length 3210.5
  Top Layer w10: v1(1485,1695) 1490,1700 1565,1625 U12.88 ; v1(2650,2830) 3235,2830 R16.1
  Bottom Layer w10: v1(1485,1695) 1485,2510 1775,2800 2620,2800 v1(2650,2830)
BREAK_IN2: R19.1 U12.87 | length 3304.8
  Top Layer w10: v1(1530,1765) 1530,1725 1610.31,1644.68 U12.87 ; v1(2710,2780) 3440.43,2780 R19.1
  Bottom Layer w10: v1(1530,1765) 1530,2525 1785,2780 v1(2710,2780)
BREAK_IN3: R22.1 U12.86 | length 2960
  Top Layer w10: v1@1575,1810 1585,1800 1585,1715 1635.63,1664.37 U12.86 ; v1(2770,2730) 3220.43,2730 R22.1
  Bottom Layer w10: v1@1575,1810 1575,2515 1790,2730 v1(2770,2730)
  other v1: 1585,1815
BREAK_IN4: R23.1 U12.85 | length 3043.2
  Top Layer w10: v1(1635,1725) 1675.94,1684.06 U12.85 ; v1(2610,2680) 3065.43,2680 3100,2645.43 R23.1
  Bottom Layer w10: v1(1635,1725) 1635,2525 1790,2680 v1(2610,2680)
BREAK_IN5: R25.1 U12.84 | length 2674.6
  Top Layer w10: v1@1675,1765 1736.26,1703.74 U12.84 ; v1(2665,2635) 3008.14,2635 3052.71,2590.43
  Top Layer w20: 3052.71,2590.43 R25.1
  Bottom Layer w10: v1@1675,1765 1675,2495 1815,2635 v1(2665,2635)
  other v1: 1675,1785
BREAK_IN6: R26.1 U12.83 | length 2784.4
  Top Layer w10: v1(1715,1850) 1719,1846 1719,1776 1771.57,1723.43 U12.83 ; v1(2595,2590) 2975.56,2590 3035.13,2530.43
  Top Layer w20: 3035.13,2530.43 R26.1
  Bottom Layer w10: v1(1715,1850) 1715,2485 1815,2585 2590,2585 v1(2595,2590)
BREAK_IN7: R27.1 U12.82 | length 2473.3
  Top Layer w10: v1@1755,1795 1750,1795 1801.89,1743.11 U12.82 ; v1(3005,2490) 3210.43,2490 R27.1
  Bottom Layer w10: v1@1755,1795 1755,2490 1820,2555 2579.09,2555 2580.09,2554 2941,2554 v1(3005,2490)
  other v1: 1765,1795
BREAK_IN8: R28.1 U12.81 | length 2430.4
  Top Layer w10: v1(1795,1865) 1795,1825 1857.2,1762.8 U12.81
  Top Layer w20: v1@3020.43,2415.43 R28.1
  Bottom Layer w10: v1(1795,1865) 1795,2365 1865,2435 3000,2435 v1(3020,2415)
BREAK_IN9: R51.1 U12.46 | length 702.1
  Top Layer w10: U12.46 3202.48,1782.48 R51.1
  Top Layer w20: R51.1@3205,1805 R51.1
BREAK_IN10: R54.1 U12.45 | length 898.1
  Top Layer w10: U12.45 3432.2,1762.8 R54.1
BREAK_IN11: R58.1 U12.44 | length 694.8
  Top Layer w10: U12.44 3171.89,1743.11 R58.1
BREAK_IN12: R59.1 U12.43 | length 929.4
  Top Layer w10: U12.43 3101.57,1723.43 3190,1635 R59.1
BREAK_IN13: R62.1 U12.42 | length 726.1
  Top Layer w10: U12.42 3056.26,1703.74 3185,1575 R62.1
BREAK_IN14: R64.1 U12.41 | length 960.7
  Top Layer w10: U12.41 3030.94,1684.06 3195,1520 R64.1
BREAK_IN15: R65.1 U12.40 | length 757.4
  Top Layer w10: U12.40 2990.63,1664.37 3195,1460 R65.1
BREAK_IN16: R66.1 U12.39 | length 992
  Top Layer w10: U12.39 2940.31,1644.68 3180,1405 R66.1
BREAK_OE1: R42.1 U12.52 | length 1605.3
  Top Layer w10: U12.52 2471.54,1994.16 2587.37,2110 3860,2110 R42.1
  Top Layer w20: R42.1 R42.1@3925,2050
BREAK_OE2: R7.1 U12.53 | length 2532.5
  Top Layer w10: U12.53 2451.85,1997.11 2587.37,2132.63 3817.63,2132.63 3910,2225 3910,2740 3820,2830 3820,3005 R7.1
  Top Layer w20: R7.1 R7.1@3875,3070
BREAK_OUT1: R21.2 U1.10 U2.18 | length 889.9
  Top Layer w20: U2.18 4110,2745 4410,3045 4579.57,3045 R21.2 4659.14,3105.43 4699.57,3065 U1.10
BREAK_OUT2: R14.2 U1.12 U2.17 | length 856.7
  Top Layer w20: U2.17 4102.43,2695 4342.43,2935 4584.57,2935 R14.2 4665.43,2965 U1.12
BREAK_OUT3: R9.2 U1.14 U2.16 | length 819.4
  Top Layer w20: U2.16 4102.01,2645 4272.01,2815 4584.57,2815 R9.2 4645.43,2865 U1.14
BREAK_OUT4: R4.2 U1.16 U2.15 | length 809.1
  Top Layer w20: U2.15 4100,2595 4210,2705 4615,2705 4640,2730 R4.2 4649.57,2765 U1.16
BREAK_OUT5: R37.2 U2.14 U4.10 | length 830.6
  Top Layer w20: U2.14 4140,2545 4245,2650 4600,2650 4640,2610 R37.2 4705.43,2520 U4.10
BREAK_OUT6: R34.2 U2.13 U4.12 | length 775.3
  Top Layer w20: U2.13 4210,2495 4230.43,2515.43 4609.57,2515.43 4640,2485 R34.2 4654.57,2470.43 4705,2420 U4.12
BREAK_OUT7: R32.2 U2.12 U4.14 | length 785
  Top Layer w20: U2.12 4415,2445 4455,2405 4615,2405 4640,2380 R32.2 4654.57,2355.43 4690,2320 U4.14
BREAK_OUT8: R30.2 U2.11 U4.16 | length 814.5
  Top Layer w20: U2.11 4350.43,2395 4460,2285.43 4634.57,2285.43 4640,2280 R30.2 4660.43,2220 U4.16
BREAK_OUT9: R61.2 U6.10 U7.18 | length 914.4
  Top Layer w20: U7.18 4115,1730 4460,2075 4585.43,2075 R61.2 4700.43,1960 U6.10
BREAK_OUT10: R57.2 U6.12 U7.17 | length 881.2
  Top Layer w20: U7.17 4180,1680 4460,1960 4585.43,1960 R57.2 4685.43,1860 U6.12
BREAK_OUT11: R50.2 U6.14 U7.16 | length 848.1
  Top Layer w20: U7.16 4230,1630 4445,1845 4585.43,1845 R50.2 4670.43,1760 U6.14
BREAK_OUT12: R45.2 U6.16 U7.15 | length 819.1
  Top Layer w20: U7.15 4310,1580 4405,1675 4465,1735 4580.43,1735 R45.2 4655.43,1660 U6.16
BREAK_OUT13: R75.2 U7.14 U9.10 | length 782.2
  Top Layer w20: U7.14 4385,1530 4405,1550 4565.43,1550 R75.2 4710.43,1405 U9.10
BREAK_OUT14: R72.2 U7.13 U9.12 | length 786.3
  Top Layer w20: U7.13 4395,1480 4450,1425 4575.43,1425 R72.2 4695.43,1305 U9.12
BREAK_OUT15: R70.2 U7.12 U9.14 | length 807
  Top Layer w20: U7.12 4315.43,1430 4445,1300.43 4585,1300.43 R70.2 4680.43,1205 U9.14
BREAK_OUT16: R68.2 U7.11 U9.16 | length 836.3
  Top Layer w20: U7.11 4265,1380 4450,1195 4590,1195 4630,1155 R68.2 4665.43,1105 U9.16
BREAK_OUTT1: PX1.2 R2.2 | length 153.5
  Top Layer w20: R2.2 5274.57,2795 PX1.2
BREAK_OUTT2: PX1.3 R6.2 | length 147.2
  Top Layer w20: R6.2 5259.57,2895 PX1.3
BREAK_OUTT3: PX1.4 R12.2 | length 141
  Top Layer w20: R12.2 5244.57,2995 PX1.4
BREAK_OUTT4: PX1.5 R18.2 | length 135.2
  Top Layer w20: R18.2 5230.43,3095 PX1.5
BREAK_OUTT5: PY1.2 R29.2 | length 330.5
  Top Layer w20: R29.2 5274.57,2270 5535,2270 PY1.2
BREAK_OUTT6: PY1.3 R31.2 | length 324.3
  Top Layer w20: R31.2 5259.57,2370 5535,2370 PY1.3
  other v1: 5260,2330
BREAK_OUTT7: PY1.4 R33.2 | length 318.1
  Top Layer w20: R33.2 5244.57,2470 5535,2470 PY1.4
BREAK_OUTT8: PY1.5 R36.2 | length 312.2
  Top Layer w20: R36.2 5230.43,2570 5535,2570 PY1.5@5540,2565
BREAK_OUTT9: PZ3.2 R44.2 | length 152.6
  Top Layer w20: R44.2 5310.43,1690.43 PZ3.2@5365,1745
BREAK_OUTT10: PZ3.3 R49.2 | length 146.4
  Top Layer w20: R49.2 5325.43,1805.43 PZ3.3@5365,1845
BREAK_OUTT11: PZ3.4 R56.2 | length 140.2
  Top Layer w20: R56.2 5340.43,1920.43 PZ3.4@5365,1945
BREAK_OUTT12: PZ3.5 R60.2 | length 131.9
  Top Layer w20: R60.2 5239.57,2045 PZ3.5@5365,2045
BREAK_OUTT13: PT5.2 R67.2 | length 322.6
  Top Layer w20: R67.2 5480.43,1130.43 PT5.2
BREAK_OUTT14: PT5.3 R69.2 | length 316.4
  Top Layer w20: R69.2 5280,1245.43 5280.57,1246 5496,1246 PT5.3
BREAK_OUTT15: PT5.4 R71.2 | length 310.2
  Top Layer w20: R71.2 5510.43,1360.43 PT5.4
BREAK_OUTT16: PT5.5 R74.2 | length 304
  Top Layer w20: R74.2 5525.43,1475.43 PT5.5
BZ: R89.2 U12.79 U15.B | length 1594.1
  Top Layer w10: R89.2@1147,2638 R89.2 1315,2625 v1(1410,2530) ; v1(1440,1965) 1441,1965 1485,1921 1826.63,1921 1856,1891.63 1856,1829 1882.83,1802.17 U12.79
  Top Layer w40: U15.B R89.2@1147,2638
  Bottom Layer w10: v1(1410,2530) 1440,2500 v1(1440,1965)
CE_1302: U12.91 U17.5 | length 1119.6
  Top Layer w10: U17.5 980.94,1565.94 U12.91
CLK_1302: U12.89 U17.7 | length 1412
  Top Layer w10: U17.7 780,1525 770,1535 770,1650 790,1670 865.32,1670 930,1605.32 U12.89
DGND: 1.3 2.3 BAT1.2 C1.2 C2.1 C3.2 C4.1 C5.2 C6.1 C7.2 C8.1 C9.2 C10.2 C11.1 C12.1 C13.2 C14.2 C15.1 C16.1 C17.1 C18.1 C19.2 C20.1 C21.1 C22.2 C23.1 C24.1 C25.2 C27.2 C28.2 C30.2 C31.2 C32.1 C33.2 C34.2 C36.2 C37.1 C38.2 C40.1 C41.2 C42.2 C43.2 CON5.2 L1.2 P7.3 P10.8 P10.9 P10.10 Power.2 Power.4 Power.6 PT5.1 PX1.1 PY1.1 PZ3.1 R87.2 R89.1 R92.1 U1.9 U1.11 U1.13 U1.15 U2.10 U3.5 U4.9 U4.11 U4.13 U4.15 U5.5 U6.9 U6.11 U6.13 U6.15 U7.10 U8.5 U9.9 U9.11 U9.13 U9.15 U10.5 U11.9 U11.11 U11.13 U11.15 U12.10 U12.20 U12.27 U12.74 U12.99 U13.3 U13.6 U13.7 U15.E U16.3 U16.6 U16.7 U17.4 U18.15 U19.2 U19.3 U19.4 | length 40487.5
  Top Layer w10: U16.7 U16.6 ; U13.7 U13.6 ; C25.2 700,2445 725,2470 725,2605 670,2660 L1.2 695,2730 1009,3044 1009,3044.05 1074.95,3110 1090,3110 ; P10.8 P10.9 P10.10 1782.5,507.5 C38.2 C33.2 ; v1@1705,1295 C14.2 1799,1339 1851.63,1339 1921.09,1408.46 U12.99 ; C17.1 1960,1980 2025,1980 2038.46,1966.54 U12.74 ; P7.3 2130,2085 v2(2130,2035) ; C34.2 2130,665 1915,665 C33.2 ; U12.10 2195.94,1150.94 2170,1125 2135,1125 C24.1 2065,1085 2020,1040 1845,1040 v1(1805,1000) 1805,775 C33.2 ; U12.20 2392.8,1207.8 2370,1185 2370,1080 C21.1 C20.1 C16.1 2835,1035 3015,855 3015,740 ; U12.27 2833.47,1408.46 C18.1@2885,1460 ; C15.1 2855,2005 2925,1935 C41.2
  Top Layer w20: U16.7 170,1835.43 130,1875.43 ; U13.7 160.43,2070.43 130,2040 130,1875.43 ; U16.3 395.43,1885.43 360,1850 ; U13.3 390.43,2120.43 360,2090 ; 575,2230 400,2230 360,2190 360,2090 ; U17.4 895,1260 C32.1 1110,1390 v1(1235,1390) 1510,1390 R92.1 ; 1090,3120 2085,3120 ; v1(2335,2380) 2335,2380.43 1.3 2174.57,2500.43 2055,2620 C40.1 1975,2760 1975,2865.43 C37.1 2055,3090 2085,3120 ; Power.2 2540,35 2955,35 2990,70 2990,90 2890.57,189.43 2879,189.43 2818,250.43 U11.9 2709.57,250.43 2680,280 2680,380 ; U18.15 2409.57,2915.43 2370,2955 C36.2 2354.57,3060.43 2295,3120 2085,3120 ; U11.11 2709.57,350.43 2680,380 ; U11.13 2709.57,450.43 2680,480 ; U11.15 2709.57,550.43 2680,580 ; v1(2805,1315) v1(3055,1315) ; v1(3130,765) 3075,765 C13.2 3015,740 2980,775 2755,775 2680,700 2680,580 ; U10.5 3660,490 3760,490 3775,505 3775,725 C12.1 ; U7.10 3785,1380 v1(3845,1440) ; U2.10 v1(3785,2395) ; C3.2 C4.1 ; v1(4035,2305) 4035,2050 C10.2 C11.1 ; U8.5 4165,505 4195,475 4295,475 4335,515 4335,730 C8.1@4280,785 ; U5.5 4725,535 4785,475 4865,475 4900,510 4900,740 v2(4855,785) ; U9.15 4810,1155 4890,1075 ; U9.13 4830,1255 4890,1195 ; U9.11 4830,1355 4890,1295 ; U9.9 4845,1455 4890,1410 ; U6.15 4875,1710 ; U6.13 4825,1810 4875,1760 ; U6.11 4870,1910 4875,1905 ; U6.9 4820,2010 4875,1955 4875,1905 ; U4.15 4855,2270 ; U4.13 4855,2370 ; U4.11 4855,2470 ; U4.9 4855,2570 ; U1.15 4870,2815 ; U1.13 4870,2915 ; U1.11 4870,3015 ; U1.9 4820,3115 4870,3065 4870,3015 ; v1(5000,2665) C1.2 ; U3.5 5345.43,480 5455,480 5490,515 5490,685 C2.1 v2(5400,860) ; PZ3.1 5405,1690 5560,1690 ; 130,1875.43 130,1735 255,1610 360,1610 360,1850 ; 360,1850 360,2090 ; 2680,380 2680,480 ; 2680,480 2680,580 ; 4855,2270 4855,2245 4925,2175 4925,2140 C5.2 5255,2120 5355,2220 5495,2220 PY1.1 5560,2155 5560,1690 ; 4855,2270 4855,2370 ; 4855,2370 4855,2470 ; 4855,2470 4855,2570 ; 4855,2570 4855,2585 4925,2655 C1.2 ; 4870,2815 4870,2720 C1.2 ; 4870,2815 4870,2915 ; 4870,2915 4870,3015 ; 4875,1710 4875,1630 4920,1585 4920,1570 C7.2 4930,1525 4890,1485 4890,1410 ; 4875,1710 4875,1760 ; 4875,1760 4875,1905 ; 4890,1075 C9.2 5255,1005 v2(5400,860) ; 4890,1075 4889,1076 4889,1194 4890,1195 ; 4890,1195 4890,1295 ; 4890,1295 4890,1410 ; v2(5400,860) 5400,950 PT5.1 5620,1170 5620,1630 5560,1690
  Top Layer w40: v3(80,950) 80,355 315,120 1590,120 1743.5,273.5 P10.9 ; C19.2 C22.2 344.45,2824.45 CON5.2 447.24,3110 1074.95,3110 ; 575,2230 C27.2@635,2170 ; C30.2 C31.2 815.43,1920.43 v1(855,1960) ; C25.2 635,2420 C27.2@635,2170 ; v1(820,2300) 750,2230 C28.2 C27.2 C27.2@635,2170 ; U15.E 1187.57,2713 C43.2 1399.57,2810.43 1400,2810 U19.3 U19.2 ; 1090,3110 1170,3030 1170,2725 R89.1
  Bottom Layer w10: 2.3 1275.43,2025.43 v2(1310,2060) ; v1(1235,1390) 1400,1555 1525,1555 1575,1505 1575,1425 v1@1705,1295 ; v1(1725,1295) 1725,1080 v1(1805,1000) 2020,1215 2705,1215 v1(2805,1315) ; v2(1960,2295) 1960,2255 P7.3
  Bottom Layer w20: v2(1930,2035) v2(2130,2035) ; v2(1960,2295) 2045,2380 v1(2335,2380) ; Power.6 2140,35 2330,35 ; Power.4 2280,85 2330,35 ; Power.2 2480,90 2425,35 2330,35 ; v1(2755,1040) 2805,1090 v1(2805,1315) ; v2(2955,1905) 2955,1500 v2(2910,1455) 3050,1315 v1(3055,1315) ; v1(3130,765) 3170,725 3670,725 v2(3735,790) 3825,700 4210,700 ; v1(3785,2395) 3815,2425 3815,2825 3930,2940 ; v2(4110,3075) 4065,3075 3930,2940 ; v2(4855,785) 4770,700 ; v1(5000,2665) 5030,2695 PX1.1 ; v2(5400,860) 5400,765 5335,700 4770,700 ; 3930,2940 3930,2410 v1(4035,2305) 3845,2115 v1(3845,1440) 4070,1215 4070,1010 v2(4295,785) 4210,700 ; 4210,700 4770,700
  Bottom Layer w40: v3(80,950) 80,1070 355,1345 v3(355,1570) ; v1(820,2300) 820,1995 v1(855,1960) 920.43,2025.43 2.3
DIR_1: R77.2 U12.18 | length 708
  Top Layer w10: R77.2 2353.43,648.85 2353.43,1288.35
DIR_2: R79.2 U12.17 | length 881.4
  Top Layer w10: R79.2 2289.57,485.43 2235,540 2235,610 2333.43,708.43 2333.43,1288.03
DIR_3: R81.2 U12.16 | length 1076.6
  Top Layer w10: R81.2 2235,370.43 2235,380 2215,400 2215,615 2314.06,714.06 U12.16
DIR_4: R83.2 U12.15 | length 1202.9
  Top Layer w10: U12.15 2294.37,717 2199,621.63 2199,281 2224.57,255.43 R83.2
DIR_T: CON4.3 R84.2 U11.10 | length 1238
  Top Layer w20: U11.10 2855,300.43 R84.2 3075.43,80 v1(3640,80)
  Bottom Layer w20: v1(3640,80) 3650,80 3669.49,99.49 CON4.3
DIR_X: CON1.3 R78.1 U11.16 | length 3119.8
  Top Layer w20: U11.16 2914.57,600.43 R78.1 2985,530 3160,530 3235,455 3235,270 3280,225 4875,225 5025,75 v1(5250,75)
  Bottom Layer w20: v1(5250,75) 5290,75 5314.49,99.49 CON1.3
DIR_Y: CON2.3 R80.2 U11.14 | length 2502.9
  Top Layer w20: U11.14 2877.29,500.43 2907.29,470.43 R80.2 2975.43,420 3160,420 3205,375 3205,257.57 3287.57,175 4435,175 4535,75 v1(4715,75)
  Bottom Layer w20: v1(4715,75) 4750,75 4784.49,109.49 CON2.3
DIR_Z: CON3.3 R82.2 U11.12 | length 1867.3
  Top Layer w20: U11.12 2849.57,400.43 2960,290 3130.15,290 3280.15,140 3960,140 4025,75 4220,75 v1(4245,100)
  Bottom Layer w20: CON3.3 4245,312.28 v1(4245,100)
I2C_SCL_1: R95.1 U12.66 U19.6 | length 1336.2
  Top Layer w10: R95.1 1785,2805.43 1785,2685 2098.5,2371.5 2193.5,2371.5 2241,2324 2241,2103.37 2195.94,2058.32 U12.66
  Top Layer w20: U19.6 1725,2835.43 R95.1
I2C_SDA_1: R96.1 U12.67 U19.5 | length 1233.6
  Top Layer w10: R96.1 1740,2700 2084.5,2355.5 2184.5,2355.5 2225,2315 2225,2110 2176.26,2061.26 U12.67
  Top Layer w20: U19.5 1690,2785.43 R96.1
I2C_WP_1: R94.1 U12.65 U19.7 | length 1516.8
  Top Layer w10: R94.1 1795.43,2910 1855,2910 1890,2875 1890,2605 2107.5,2387.5 2200.13,2387.5 2257,2330.63 2257,2096.75 2215.63,2055.38 U12.65
  Top Layer w20: U19.7 1660,2885.43 R94.1
IO_1302: R90.1 U12.90 U17.6 | length 1314.4
  Top Layer w10: R90.1 830,1595 U17.6@830,1500 ; U17.6 U17.6@830,1500 ; U12.90 940.63,1585.63 880,1525 855,1525 U17.6@830,1500
NetC26_2: C26.2 U13.4 | length 109.5
  Top Layer w20: U13.4 500,2170.43 C26.2
NetC29_2: C29.2 U16.4 | length 101.2
  Top Layer w20: U16.4 520,1935.43 C29.2
NetC33_1: C33.1 U12.12 Y1.1 | length 867.6
  Top Layer w10: C33.1 1930.37,739.63 Y1.1 1990.28,840.28 2050,900 2050,990 2075,1015 2205,1015 2235.31,1045.32 U12.12
NetC34_1: C34.1 R91.2 Y1.2 | length 283.1
  Top Layer w10: C34.1 2085,794.91 Y1.2 2120,850.65 R91.2
NetC35_1: C35.1 U18.3 | length 296.4
  Top Layer w20: C35.1 2249.57,3060.43 2335,2975 2335,2880 2320.43,2865.43 U18.3
NetC35_2: C35.2 U18.1 | length 149.3
  Top Layer w20: C35.2 2250,2965.43 U18.1
NetC37_2: C37.2 U18.2 | length 132.4
  Top Layer w20: C37.2 2175,2915.43 U18.2
NetC38_1: C38.1 R93.1 U12.14 | length 978.2
  Top Layer w10: C38.1 1965,590 R93.1 2144.37,590 2274.69,720.32 U12.14
NetC39_1: C39.1 U18.5 | length 138.5
  Top Layer w20: C39.1 2189.57,2765.43 U18.5
NetC39_2: C39.2 U18.4 | length 253.3
  Top Layer w20: C39.2 2110,2865 2180,2865 2229.57,2815.43 U18.4
NetC40_2: C40.2 U18.6 | length 134.7
  Top Layer w20: C40.2 2180.43,2715.43 U18.6
NetC41_1: C41.1 U12.49 | length 350.3
  Top Layer w10: U12.49 2621.54,1841.54 2645,1865 2645,1900 2675,1930 2810,1930 C41.1
NetC42_1: C42.1 U12.73 | length 124.4
  Top Layer w10: C42.1 2058.15,2006.85 U12.73
NetL1_1: L1.1 R85.1 | length 135
  Top Layer w20: L1.1 R85.1
NetP7_1: P7.1 R87.1 U12.76 | length 600
  Top Layer w10: R87.1 P7.1 1815,2150 1760,2095 1760,2005 1790,1975 1852.37,1975 1957.76,1869.62 U12.76
NetP7_2: P7.2 R86.2 U12.72 | length 462.6
  Top Layer w10: U12.72 2077.83,2072.17 2040,2110 2005,2110 P7.2 2080,2265 R86.2
NetP8_1: P8.1 R92.2 U12.94 | length 403.2
  Top Layer w10: R92.2 1654.09,1385 1759.09,1490 P8.1 1781.89,1506.89 U12.94
NetR2_1: R2.1 U1.2 | length 167.6
  Top Layer w20: U1.2 5075.43,2815 R2.1
NetR6_1: R6.1 U1.4 | length 161.4
  Top Layer w20: U1.4 5090.43,2915 R6.1
NetR7_2: R7.2 U2.19 | length 320.6
  Top Layer w20: R7.2 3875,2840 3920,2795 U2.19
NetR10_2: R10.2 U2.1 | length 121.6
  Top Layer w10: R10.2 3672.99,2927.01 U2.1
NetR12_1: R12.1 U1.6 | length 155.1
  Top Layer w20: U1.6 5105.43,3015 R12.1
NetR16_2: R16.2 U2.2 | length 355.4
  Top Layer w20: R16.2 3580,2825 3610,2795 U2.2
NetR18_1: R18.1 U1.8 | length 148.9
  Top Layer w20: U1.8 5120.43,3115 R18.1
NetR19_2: R19.2 U2.3 | length 129.4
  Top Layer w20: R19.2 3565.43,2745 U2.3
NetR22_2: R22.2 U2.4 | length 349.4
  Top Layer w20: R22.2 3345.43,2695 U2.4
NetR23_2: R23.2 U2.5 | length 123.2
  Top Layer w20: R23.2 3550.43,2645 U2.5
NetR24_2: R24.2 U3.3 | length 128.5
  Top Layer w20: R24.2@4955,560 4975.43,580.43 U3.3
NetR25_2: R25.2 U2.6 | length 349.9
  Top Layer w20: R25.2 3329.57,2595 U2.6
NetR26_2: R26.2 U2.7 | length 129
  Top Layer w20: R26.2 3564.57,2545 U2.7
NetR27_2: R27.2 U2.8 | length 360.2
  Top Layer w20: R27.2 3345,2485.43 3605,2485.43 3614.57,2495 U2.8
NetR28_2: R28.2 U2.9 | length 135.2
  Top Layer w20: R28.2 3579.57,2445 U2.9
NetR29_1: R29.1 U4.2 | length 164.3
  Top Layer w20: U4.2 5095.43,2270 R29.1
NetR31_1: R31.1 U4.4 | length 158.1
  Top Layer w20: U4.4 5110.43,2370 R31.1
NetR33_1: R33.1 U4.6 | length 151.9
  Top Layer w20: U4.6 5125.43,2470 R33.1
NetR36_1: R36.1 U4.8 | length 146
  Top Layer w20: U4.8 5139.57,2570 R36.1
NetR38_2: R38.2 U5.3 | length 120.5
  Top Layer w20: R38.2 4420.43,585.43 U5.3
NetR42_2: R42.2 U7.19 | length 271.5
  Top Layer w20: R42.2 3925,1815 3960,1780 U7.19
NetR44_1: R44.1 U6.2 | length 158.9
  Top Layer w20: U6.2 5125.43,1710 R44.1
NetR46_2: R46.2 U7.1 | length 220.1
  Top Layer w20: U7.1 3730,1830 3810,1910 R46.2
NetR49_1: R49.1 U6.4 | length 152.7
  Top Layer w20: U6.4 5140.43,1810 R49.1
NetR51_2: R51.2 U7.2 | length 363.3
  Top Layer w20: R51.2 3580,1805 3605,1780 U7.2
NetR54_2: R54.2 U7.3 | length 141.3
  Top Layer w20: R54.2 3555,1730 U7.3
NetR56_1: R56.1 U6.6 | length 155.1
  Top Layer w20: U6.6 5134.57,1910 R56.1
NetR58_2: R58.2 U7.4 | length 357.1
  Top Layer w20: R58.2 3325,1680 U7.4
NetR59_2: R59.2 U7.5 | length 135.1
  Top Layer w20: R59.2 3540,1630 U7.5
NetR60_1: R60.1 U6.8 | length 163.4
  Top Layer w20: U6.8 5114.57,2010 R60.1
NetR62_2: R62.2 U7.6 | length 355.1
  Top Layer w20: R62.2 3320,1580 U7.6
NetR63_2: R63.2 U8.3 | length 121.2
  Top Layer w20: R63.2 3845,590 U8.3
NetR64_2: R64.2 U7.7 | length 137.1
  Top Layer w20: R64.2 3545,1530 U7.7
NetR65_2: R65.2 U7.8 | length 361.3
  Top Layer w20: R65.2 3600,1460 3620,1480 U7.8
NetR66_2: R66.2 U7.9 | length 143.3
  Top Layer w20: R66.2 3560,1430 U7.9
NetR67_1: R67.1 U9.2 | length 171
  Top Layer w20: U9.2 5120.43,1155 R67.1
NetR69_1: R69.1 U9.4 | length 164.8
  Top Layer w20: U9.4 5135.43,1255 R69.1
NetR71_1: R71.1 U9.6 | length 163.1
  Top Layer w20: U9.6 5139.57,1355 R71.1
NetR74_1: R74.1 U9.8 | length 169.3
  Top Layer w20: U9.8 5124.57,1455 R74.1
NetR76_2: R76.2 U10.3 | length 114.1
  Top Layer w20: R76.2 3285,595 U10.3
NetR77_1: R77.1 U11.2 | length 161.5
  Top Layer w20: R77.1 2445,550.43 U11.2
NetR79_1: R79.1 U11.4 | length 155.3
  Top Layer w20: R79.1 2430,450.43 U11.4
NetR81_1: R81.1 U11.6 | length 149.1
  Top Layer w20: R81.1 2415,350.43 U11.6
NetR83_1: R83.1 U11.8 | length 142.9
  Top Layer w20: R83.1 2400,250.43 U11.8
NetR88_1: R88.1 U15.C | length 100.2
  Top Layer w40: R88.1 979.57,2675.43 U15.C
NetR88_2: R88.2 U14.2 | length 459.3
  Top Layer w40: R88.2 790,2760 U14.2
NetR91_1: R91.1 U12.13 | length 376.4
  Top Layer w10: R91.1 2255,1015 U12.13
NetU17_2: U17.2 X1.2 | length 319.2
  Top Layer w20: X1.2 725,1025 725,1150 780,1205 U17.2
NetU17_3: U17.3 X1.1 | length 160.7
  Top Layer w20: X1.1 830,1155 U17.3
PA4: U12.29
PC0: U12.35
PC1: U12.36
PC2: U12.78
PC4: U12.33
PC12: U12.55
PC13: P9.8 U12.7 | length 2024.3
  Top Layer w10: P9.8 670,630 730,690 1050.76,690 1489.76,1129 1986.6,1129 2136.89,1279.29 U12.7
PC14: P9.9 U12.8 | length 2104.7
  Top Layer w10: P9.9 720,340 720,610 775,665 1048.39,665 1496.39,1113 1993.22,1113 2156.57,1276.35 U12.8
PC15: P9.10 U12.9 | length 1949
  Top Layer w10: P9.10 770,599 816,645 1070,645 1522,1097 1999.85,1097 2176.26,1273.41 U12.9
PE0: P9.1 U12.97 | length 2298.1
  Top Layer w10: P9.1 300,360 300,515 665,880 1050,880 1427,1257 1577,1257 1695,1375 1840,1375 1912.83,1447.83 U12.97
PE1: P9.2 U12.98 | length 2117.4
  Top Layer w10: P9.2 370,560 660,850 1052.37,850 1443.37,1241 1586,1241 1700,1355 1845,1355 1918.15,1428.15 U12.98
PE2: P9.3 U12.1 | length 2233.3
  Top Layer w10: P9.3 470,310 420,360 420,575 670,825 1050,825 1450,1225 1945,1225 2018.78,1298.78 U12.1
PE3: P9.4 U12.2 | length 2093.8
  Top Layer w10: P9.4 470,590 680,800 1047.63,800 1456.63,1209 1953.46,1209 2038.46,1294.01 U12.2
PE4: P9.5 U12.3 | length 2195.5
  Top Layer w10: P9.5 520,340 520,605 685,770 1040.25,770 1463.25,1193 1960.09,1193 2059.06,1291.97 2059.06,1326.85 U12.3
PE5: P9.6 U12.4 | length 2051.3
  Top Layer w10: P9.6 570,615 692.12,737.12 1030,737.12 1469.88,1177 1966.71,1177 2077.83,1288.12 U12.4
PE6: P9.7 U12.5 | length 2152.9
  Top Layer w10: P9.7 620,340 620,630 700,710 1025.51,710 1476.51,1161 1973.34,1161 2098.43,1286.08 2098.43,1326.85 U12.5
PE7: U12.38
RX3: P10.6 U12.93 | length 1613.6
  Top Layer w10: v1(1500,1495) 1531.57,1526.57 U12.93 ; P10.6 1625.5,580.5 v1(1650,605)
  Bottom Layer w10: v1(1500,1495) 1500,755 v1(1650,605)
RXD: U18.14
RXD2: 1.1 U18.7 | length 270.8
  Top Layer w20: U18.7 2339.57,2665.43 2415,2590 1.1
TIM1_BKIN: U12.31
TIM1_CH2: U12.68
TIM1_ETR: U12.71
TIM2_CH1_ETR: U12.30
TIM2_CH2: P1.1 R24.1 U12.24 | length 3039.4
  Top Layer w10: U12.24 2471.54,1253.46 2530,1195 3150,1195 3255,1090
  Top Layer w20: 3255,1090 3970,1090 4050,1010 4425,1010 4580,855 4990,855 P1.1 4965,670 R24.1
TIM2_PWM1: CON1.2 R15.1 U3.6 | length 454.2
  Top Layer w20: CON1.2 5225,393.31 5225,560 5245.43,580.43 U3.6 5389.57,580.43 R15.1
TIM3_CH2: P2.1 R38.1 U12.32 | length 2518.8
  Top Layer w10: U12.32 2988.11,1506.89 3160,1335 3775,1335 v1(3845,1265)
  Top Layer w20: v1(3850,1035) 3940,945 4310,945 P2.1 4395,700 R38.1
  Bottom Layer w20: v1(3845,1265) 3845,1040 v1(3850,1035)
TIM3_ETR: U12.77
TIM3_PWM2: CON2.2 R35.1 U5.6 | length 462.7
  Top Layer w20: CON2.2@4615.51,317.63 4645,347.12 4645,555 4675.43,585.43 U5.6 4809.57,585.43 R35.1
TIM4_CH1: P6.1 R76.1 U12.59 | length 2881.9
  Top Layer w10: U12.59 2333.74,2230.11 2381.81,2278.19 3065,2278.19 3103.19,2240 v1(3105,2240) ; R76.1 3275,730 3340,795 P6.1
  Bottom Layer w10: v1(3105,2240) 3105,1345 3395,1055 P6.1
TIM4_CH2: U12.60
TIM4_CH3: U12.61
TIM4_CH4: U12.62
TIM4_PWM4: CON4.2 R73.1 U10.6 | length 456.1
  Top Layer w20: CON4.2 3519.49,574.49 3540,595 U10.6 3690,595 R73.1
TIM5_CH3: P4.1 R63.1 U12.25 | length 1948.8
  Top Layer w10: U12.25 2491.22,1256.41 2536.63,1211 3354,1211 v1(3415,1150)
  Top Layer w20: v1(3475,975) 3695,975 3880,790 3910,790 ; R63.1 3830,710 3910,790 ; P4.1 3910,790
  Bottom Layer w10: v1(3415,1150) 3415,1035 v1(3475,975)
TIM5_PWM3: CON3.2 R53.1 U8.6 | length 452.3
  Top Layer w20: CON3.2 4074.49,559.49 4105,590 U8.6 4245,590 R53.1
TIM8_CH1: P1.2 U12.63 | length 4318.9
  Top Layer w10: U12.63 2255,2035 2301.31,2081.31 2301.31,2220.31 2376,2295 3060,2295 3061,2296 3101.63,2296 3102.63,2295 v1(3155,2295)
  Top Layer w20: v1(3505,1140) 3980,1140 4075,1045 4450,1045 4610,885 5060,885 P1.2
  Bottom Layer w10: v1(3155,2295) 3505,1945 v1(3505,1140)
TIM8_CH2: U12.64
TIM9_CH2: P2.2 U12.26 | length 2374.5
  Top Layer w10: U12.26 3066.22,1388.78 3145,1310 3715,1310 3810,1215 v1(3940,1215)
  Top Layer w20: v1(3940,1045) 4005,980 4375,980 P2.2
  Bottom Layer w20: v1(3940,1045) v1(3940,1215)
TIM10_CH1: P4.2 U12.95 | length 2834.5
  Top Layer w10: v1(1760,1420) 1827.2,1487.2 U12.95
  Top Layer w20: v1(3255,1040) 3260,1035 3740,1035 3815,960 3870,960 4040,790 P4.2
  Bottom Layer w10: v1(1760,1420) 1830,1490 2770,1490 3220,1040 v1(3255,1040)
TIM11_CH1: P6.2 U12.96 | length 2121.7
  Top Layer w10: v1(1830,1420) 1825,1420 1872.52,1467.52 U12.96
  Top Layer w20: v1@3280,942.5 3342.5,942.5 3490,795 P6.2
  Bottom Layer w10: v1(1830,1420) 1880,1470 2755,1470 v1(3280,945)
TX3: P10.5 U12.92 | length 1711
  Top Layer w10: v1(1425,1495) 1415,1505 1456.26,1546.26 U12.92 ; v1(1580,605) 1585.5,599.5 P10.5
  Bottom Layer w10: v1(1425,1495) 1475,1445 1475,710 v1(1580,605)
TXD: U18.13
TXD2: 1.2 U18.8 | length 135.7
  Top Layer w20: U18.8 2265,2550.43 1.2
UART_RX: U18.12
UART_TX: U18.11
USART1_RX: U12.48 U18.9 | length 1002.2
  Top Layer w10: U18.9 2485,2520 v1(2630,2375) ; U12.48 2651.85,1821.85 2700,1870 v1(2690,1880)
  Bottom Layer w10: v1(2630,2375) 2690,2315 v1(2690,1880)
USART1_TX: U12.47 U18.10 | length 1149.4
  Top Layer w10: U18.10 2519.57,2665.43 2545,2640 2545,2520 v1(2705,2360) ; U12.47 2707.17,1802.17 v1(2730,1825)
  Bottom Layer w10: v1(2705,2360) 2730,2335 v1(2730,1825)
VBAT: BAT1.1 U17.8 | length 670.5
  Top Layer w20: BAT1.1 355,1150 670,1465 U17.8
pads on no net: P9.11 P9.12 P9.13 P9.14 P9.15 P9.16 P10.0 P10.4 P10.7 U3.1 U3.4 U5.1 U5.4 U8.1 U8.4 U10.1 U10.4 U12.6 U12.23 U12.34 U12.37 U12.56 U12.57 U12.58 U12.69 U12.70 X1.
copper on no net:
  other v4: 120,160 5530,160 120,3165 5530,3165

## Keep-outs
Keep-Out Layer:
  lines w10: 0,705.43 0,3260.43 5655,3260.43 5655,5.43 105,5.43 0,5.43 0,110.43 0,1310.43

## Silkscreen, mask and mechanical layers (free items; w line width, h text height)
Top Overlay:
  lines w10: 2785,2515 2785,3230 ; 2935,2485 2980,2530 2980,3230 ; 4470,2175 4470,3150 4530,3210 ; 4480,2105 4480,1060 4520,1020
  text "1" at 4555,3175 h60
  text "2" at 2765,2430 h60
  text "1" at 2910,2400 h60
  text "2" at 4540,970 h60

## Text inside footprints (layer, text, board x,y; h text height)
P9: Top Overlay "2" at 270,370 h50; Top Overlay "1" at 270,270 h50; Top Overlay "15" at 1130,270 h50; Top Overlay "16" at 1130,370 h50